# EAGLE board diagrama PCB (EAGLE 9.7.0)
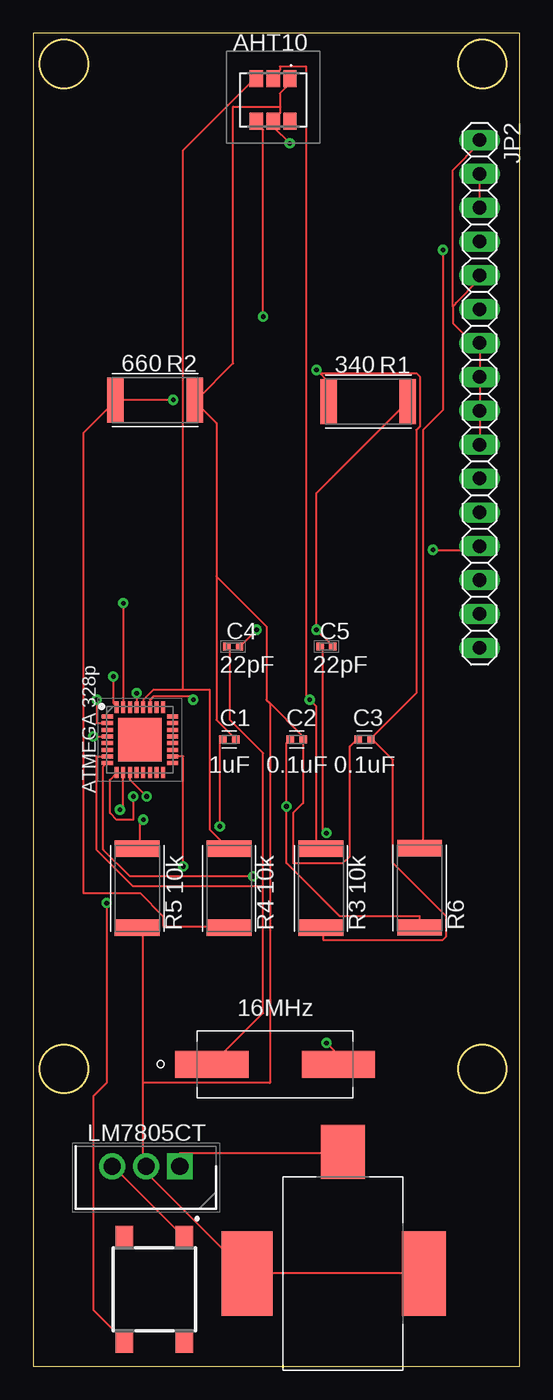
[diagram p0: board, top side]
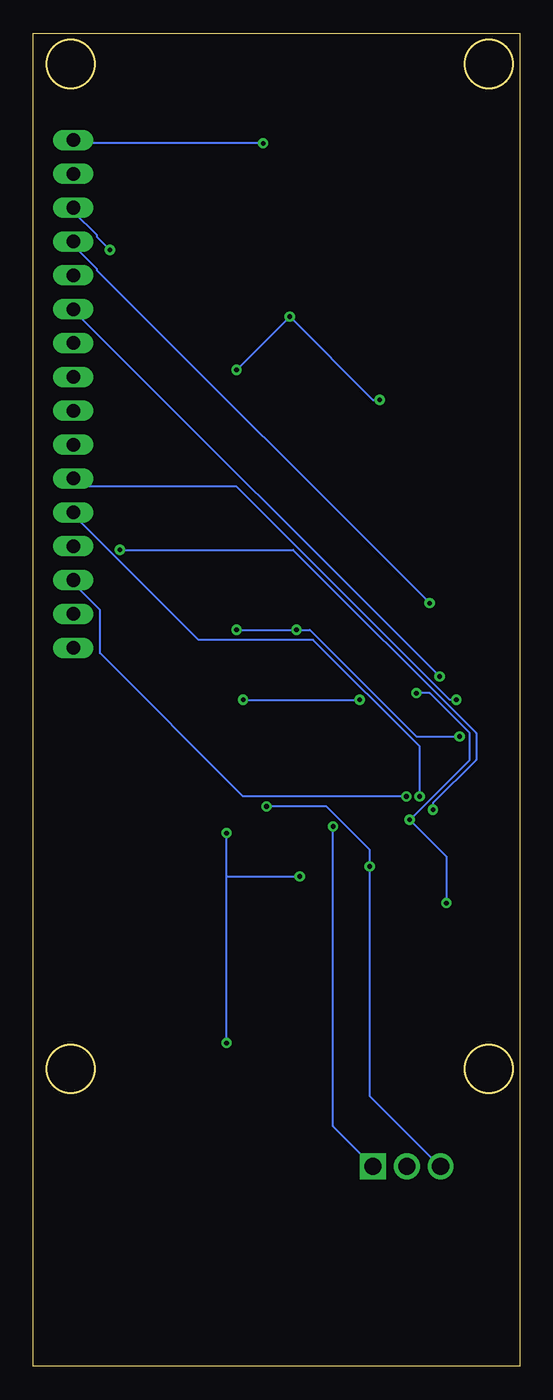
[diagram p1: board, bottom side, seen from below]

Size 36.5 x 100 mm. Coordinates in mm from the lower left corner, seen from the top.
Outline: 0,0 36.5,0 36.5,100 0,100 0,0
Outline: circle at 2.3,22.3 radius 1.8
Outline: circle at 33.7,22.3 radius 1.8
Outline: circle at 33.7,97.7 radius 1.8
Outline: circle at 2.3,97.7 radius 1.8
Copper layers (1*16): Top 0.035mm / dielectric 1.5mm / Bottom 0.035mm
Design rules "default": minimum track width 6mil, minimum drill 0.35mm, track to track 6mil, track to pad 6mil, pad to pad 6mil, via to via 6mil, smd to smd 6mil, copper to edge 40mil, drill to drill 6mil, minimum pad ring 10mil, minimum via ring 8mil, stop-mask expansion 4mil, vias tented up to drill 0mil, thermal gap 10mil

## Footprints (pad centres in the part's own frame; a part is rotated, then mirrored left to right if it is on the bottom)
CAPC1005X60 = smd 0.56 x 0.629: 1 -0.485,0; 2 0.485,0
CAPC1005X55N = smd 0.56 x 0.62: 1 -0.48,0; 2 0.48,0
AHT10 = smd 1.27 x 1: 1 -1.6,1.27; 2 -1.6,0; 3 -1.6,-1.27; 4 1.6,-1.27; 5 1.6,0; 6 1.6,1.27
QFN50P500X500X100-33N = smd 0.85 x 0.3: 1 -2.45,1.75; 2 -2.45,1.25; 3 -2.45,0.75; 4 -2.45,0.25; 5 -2.45,-0.25; 6 -2.45,-0.75; 7 -2.45,-1.25; 8 -2.45,-1.75; 17 2.45,-1.75; 18 2.45,-1.25; 19 2.45,-0.75; 20 2.45,-0.25; 21 2.45,0.25; 22 2.45,0.75; 23 2.45,1.25; 24 2.45,1.75 | smd 0.3 x 0.85: 9 -1.75,-2.45; 10 -1.25,-2.45; 11 -0.75,-2.45; 12 -0.25,-2.45; 13 0.25,-2.45; 14 0.75,-2.45; 15 1.25,-2.45; 16 1.75,-2.45; 25 1.75,2.45; 26 1.25,2.45; 27 0.75,2.45; 28 0.25,2.45; 29 -0.25,2.45; 30 -0.75,2.45; 31 -1.25,2.45; 32 -1.75,2.45 | smd 3.25 x 3.25: 33 0,0
TO254P470X1028X1955-3P = drill 1.29 pad 1.935 square: 1 0,0 | drill 1.29 pad 1.935: 2 2.54,0; 3 5.08,0
RASM722X = smd 3.3 x 4.06: PIN 0,9.14 | smd 3.3 x 6.35: SHUNT 6.1,0 | smd 3.81 x 6.35: SLEEVE -7.19,0
1X16 = drill 1.016 long: 1 -19.05,0; 2 -16.51,0; 3 -13.97,0; 4 -11.43,0; 5 -8.89,0; 6 -6.35,0; 7 -3.81,0; 8 -1.27,0; 9 1.27,0; 10 3.81,0; 11 6.35,0; 12 8.89,0; 13 11.43,0; 14 13.97,0; 15 16.51,0; 16 19.05,0
RESC6332X71 = smd 1.231 x 3.37: 1 -2.97,0; 2 2.97,0
430182070816 = smd 1.55 x 1.3: 1 -3.975,2.25; 2 -3.975,-2.25; 3 3.975,2.25; 4 3.975,-2.25
XTAL1170X500X450N = smd 5.5 x 2: 1 -4.75,0; 2 4.75,0

## Placement (x,y rotation side)
C1  1uF  [CAPC1005X60]  14.7,47.02 0 top
C2  0.1uF  [CAPC1005X60]  19.78,47.02 0 top
C3  0.1uF  [CAPC1005X60]  24.86,47.02 0 top
C4  VJ0402A560FXQCW1BC  [CAPC1005X55N]  15,54 180 top
C5  VJ0402A560FXQCW1BC  [CAPC1005X55N]  22,54 180 top
IC1  AHT10  [AHT10]  18,95 270 top
IC2  ATMEGA328P-MNR  [QFN50P500X500X100-33N]  8,47 0 top
IC3  LM7805CT  [TO254P470X1028X1955-3P]  11,15 180 top
J1  RASM722  [RASM722X]  23.23,6.95 0 top
JP2  PINHD-1X16  [1X16]  33.5,72.95 270 top
R1  340  [RESC6332X71]  25.14,72.37 180 top
R2  660  [RESC6332X71]  9.14,72.48 180 top
R3  10k  [RESC6332X71]  21.59,35.86 90 top
R4  10k  [RESC6332X71]  14.7,35.86 90 top
R5  10k  [RESC6332X71]  7.81,35.86 90 top
R6  10k  [RESC6332X71]  29,35.89 90 top
S1  430182050816  [430182070816]  9.08,5.77 270 top
XTAL1  16MHz  [XTAL1170X500X450N]  18.16,22.65 0 top

## Library data of the parts
C1-C3 = Capacitor; CATEGORY: Capacitor
C4 C5 = Capacitor; DESCRIPTION: Multilayer Ceramic Capacitors MLCC - SMD/SMT 0402 56pF 10volts C0G 1%; HEIGHT: 0.55mm; MANUFACTURER_NAME: Vishay; MANUFACTURER_PART_NUMBER: VJ0402A560FXQCW1BC; MOUSER_PART_NUMBER: 77-VJ0402A560FXQCBC; MOUSER_PRICE-STOCK: https://www.mouser.com/Search/Refine.aspx?Keyword=77-VJ0402A560FXQCBC
IC1 = AHT10; DESCRIPTION: AHT10 Integrated temperature and humidity sensor; HEIGHT: 1.7mm; MANUFACTURER_NAME: Aosong (Guangzhou) Elec; MANUFACTURER_PART_NUMBER: AHT10
IC2 = ATMEGA328P; ARROW_PART_NUMBER: ATMEGA328P-MNR; ARROW_PRICE-STOCK: https://www.arrow.com/en/products/atmega328p-mnr/microchip-technology?region=nac; DESCRIPTION: 8-bit Microcontrollers - MCU AVR 32K FLSH 2K SRAM 1KB EE-20 MHZ 105C; HEIGHT: 1mm; MANUFACTURER_NAME: Microchip; MANUFACTURER_PART_NUMBER: ATMEGA328P-MNR; MOUSER_PART_NUMBER: 556-ATMEGA328P-MNR; MOUSER_PRICE-STOCK: https://www.mouser.co.uk/ProductDetail/Microchip-Technology-Atmel/ATMEGA328P-MNR?qs=6Dg1WZIWLC5fsr6lNbxG3A%3D%3D
IC3 = LM7805CT; ARROW_PART_NUMBER: LM7805CT; ARROW_PRICE-STOCK: https://www.arrow.com/en/products/lm7805ct/texas-instruments; DESCRIPTION: Linear voltage regulator,LM7805CT 5V 1A; HEIGHT: 4.7mm; MANUFACTURER_NAME: Texas Instruments; MANUFACTURER_PART_NUMBER: LM7805CT; MOUSER_PART_NUMBER: 926-LM7805CT; MOUSER_PRICE-STOCK: https://www.mouser.co.uk/ProductDetail/Texas-Instruments/LM7805CT?qs=QbsRYf82W3EaqXeMDVwIfQ%3D%3D
J1 = Connector; CREATED_BY: PCBLayout.com; DIGI-KEY_PART_NO: RASM722X-ND; MANUFACTURER: Switchcraft Inc.; MPN: RASM722X
JP2 = Connector; CATEGORY: CONNECTOR; SUB-CATEGORY: PIN-HEADER
R1-R6 = Resistor; CATEGORY: Resistor; SUB-CATEGORY: Fixed
S1 = button; DESCRIPTION: Black Tactile Tactile Switch, NO 50 mA 1.6mm Surface Mount; HEIGHT: mm; MANUFACTURER_NAME: Wurth Elektronik; MANUFACTURER_PART_NUMBER: 430182050816; MOUSER_PART_NUMBER: 710-430182050816; MOUSER_PRICE-STOCK: https://www.mouser.co.uk/ProductDetail/Wurth-Elektronik/430182050816?qs=wr8lucFkNMUyle0jQPgWGw%3D%3D
XTAL1 = Frequency-Source; CATEGORY: Resistance Weld; DESCRIPTION: SMD Crystal; FREQUENCY: 16MHZ; MANUFRACTURER: Fox Electronics; MPN: FC4SDCBMF16.0-T1; OPERATING_TEMPERATURE: -20*C to 70*c; PART_STATUS: Active; ROHS_COMPLIANT: COMPLIANT; SERIES: C4SD; SUB_CATEGORY: Resistance Weld SMD Crystal; TOLERANCE: ±30ppm; TYPE: Crystal

## Nets
GND: C1.2 C2.2 C3.1 IC1.1 IC1.5 IC3.2 J1.SHUNT J1.SLEEVE JP2.1 JP2.5 JP2.7 JP2.8 JP2.9 JP2.10 R2.1 R5.1
N$1: IC1.3 IC2.28 R4.2
N$2: C4.2 IC2.7 XTAL1.1
N$3: C3.2 IC1.4 R1.2 R2.2 R3.1 R4.1
N$4: C5.2 IC2.8 XTAL1.2
N$5: C1.1 IC3.1 J1.PIN
N$6: JP2.2 JP2.3 R6.2
N$7: IC1.2 IC2.27 R3.2
N$9: C2.1 IC2.18 IC3.3 R6.1 S1.1
N$10: IC2.29 R5.2 S1.4
N$11: C4.1 C5.1 IC2.4 R1.1
N$12: IC2.31 JP2.4
N$13: IC2.32 JP2.6
N$14: IC2.11 JP2.14
N$15: IC2.10 JP2.13
N$16: IC2.9 JP2.12
N$17: IC2.2 JP2.11

## Tracks (layer width: path | path; a pad name or v marks a point on that pad's centre or on a via)
GND  (via drill 0.35)
  Top 0.152: 8.25,21.25 8.25,15 IC3.2 8.5,15 8.5,14.5 16,7 J1.SLEEVE 16.25,7 29.25,7 J1.SHUNT | 8.25,21.25 8.25,32.5 8,32.75 R5.1 | 31.5,79.5 31.5,78.25 32.99,76.76 JP2.7 JP2.8 JP2.9 33.5,69.18 JP2.10 | 31.5,79.5 31.5,89.75 33.46,91.71 JP2.1 | 18.5,94.5 18.5,95.5 19.25,96.25 19.25,96.5 IC1.1 | 18.5,94.5 18.5,94 18,93.5 IC1.5 18,93 v19.25,91.75 | 13.75,59.25 13.75,70.75 12.25,72.25 R2.1 12.25,72.5 15,75.25 15,94.5 18.5,94.5 | 13.75,59.25 13.75,48.5 15,47.25 C1.2 | 17.75,49.75 17.5,50 17.5,55.5 13.75,59.25 | 17.75,49.75 20.25,47.25 C2.2 20.25,47 20.25,42.25 19.5,41.5 19.5,37.75 23.25,37.75 23.75,38.25 23.75,46.5 24.25,47 C3.1 | 8.25,21.25 17.75,21.25 17.75,49.75 | 31.5,79.5 31.71,79.71 31.71,79.76 33.46,81.51 JP2.5
  Bottom 0.152: v19.25,91.75 33.21,91.75 JP2.1
N$1
  Top 0.152: IC2.28 8.25,50 9,50.75 11.25,50.75 | 11.25,50.75 13.25,50.75 13.25,40.25 14.5,39 R4.2 | 11.25,50.75 11.25,91.25 16.5,96.5 IC1.3
N$2
  Top 0.152: 17.25,36 17.25,26.5 13.5,22.75 XTAL1.1 | 17.25,36 17.25,46 14.75,48.5 14.75,54 C4.2 | IC2.7 4.75,45.75 4.75,38.75 7.5,36 17.25,36
N$3  (via drill 0.35)
  Top 0.152: R3.1 21.75,32.75 21.75,32 30.75,32 31,32.25 31,33.75 27,37.75 27,45.5 25.5,47 C3.2 25.5,47.25 28.75,50.5 28.75,70.25 29,70.5 29,74.25 28.75,74.5 21.5,74.5 | v17.25,78.75 17.25,92.75 16.75,93.25 IC1.4 | 21.5,74.5 22,74 22,72.5 R1.2 | v10.5,72.5 6.25,72.5 R2.2 6,72.25 3.75,70 3.75,35.5 8,35.5 9.75,33.75 9.75,33 14.5,33 R4.1 | 21.5,74.5 v21.25,74.75
  Bottom 0.152: v21.25,74.75 v17.25,78.75 11,72.5 v10.5,72.5
N$4  (via drill 0.35)
  Top 0.152: v22,40 21.75,40.25 21.75,54 C5.2 | v22,24.25 22.75,23.5 22.75,22.75 XTAL1.2 | v16.5,36.75 7.25,36.75 5.25,38.75 5.25,45 5.5,45.25 IC2.8
  Bottom 0.152: v22,24.25 22,36.75 | 22,36.75 v22,40 | 22,36.75 v16.5,36.75
N$5  (via drill 0.35)
  Top 0.152: v14,40.5 14,47 C1.1 | IC3.1 11,16 23,16 J1.PIN
  Bottom 0.152: v14,40.5 14,18 IC3.1
N$6  (via drill 0.35)
  Top 0.152: v30.75,83.75 30.75,71.75 29.25,70.25 29.25,39.25 29,39 R6.2 | JP2.3 JP2.2
  Bottom 0.152: v30.75,83.75 31.71,84.71 31.71,84.84 33.46,86.59 JP2.3
N$7  (via drill 0.35)
  Top 0.152: IC2.27 8.75,50 9,50.25 12,50.25 v12,50 | R3.2 21.5,39 21.25,39.25 21.25,49.5 v20.75,50 20.5,50.25 20.5,97.5 18.5,97.5 18.5,97.25 18,96.75 IC1.2
  Bottom 0.152: v20.75,50 v12,50
N$9  (via drill 0.35)
  Top 0.152: R6.1 29,33.75 23,33.75 19,37.75 v19,42 19,46.75 19.25,47 C2.1 | IC2.18 11.25,45.75 v11.25,37.5 | S1.1 11.25,9.75 6,15 IC3.3
  Bottom 0.152: IC3.3 6,15 11.25,20.25 v11.25,37.5 11.25,38.75 14.5,42 v19,42
N$10  (via drill 0.35)
  Top 0.152: v7.75,50.5 IC2.29 | v8.25,41 8,40.75 8,39 R5.2 | v5.5,34.75 5.5,21.25 4.5,20.25 4.5,4.25 6.75,2 S1.4
  Bottom 0.152: v7.75,50.5 6.75,50.5 3.75,47.5 3.75,45.5 v8.25,41 5.5,38.25 v5.5,34.75
N$11  (via drill 0.35)
  Top 0.152: v16.75,55.25 15.5,54 C4.1 | C5.1 22.25,54 22.25,54.25 v21.25,55.25 21.25,65.5 28,72.25 R1.1 | v4.5,47.25 IC2.4
  Bottom 0.152: v21.25,55.25 v16.75,55.25 15.75,55.25 7.75,47.25 v4.5,47.25
N$12  (via drill 0.35)
  Top 0.152: v6.75,57.25 IC2.31
  Bottom 0.152: v6.75,57.25 31.71,82.21 31.71,82.3 33.46,84.05 JP2.4
N$13  (via drill 0.35)
  Top 0.152: v6,51.75 6,49.75 6.25,49.5 IC2.32
  Bottom 0.152: v6,51.75 33.46,79.21 JP2.6
N$14  (via drill 0.35)
  Top 0.152: IC2.11 7.25,44 v8.5,42.75
  Bottom 0.152: v8.5,42.75 20.75,42.75 31.5,53.5 31.5,56.75 33.46,58.71 JP2.14
N$15  (via drill 0.35)
  Top 0.152: IC2.10 6.75,42 v6.5,41.75 | v30,61.25 33.19,61.25 JP2.13
  Bottom 0.152: v6.5,41.75 6.5,42.25 3.25,45.5 3.25,47.5 17,61.25 v30,61.25
N$16  (via drill 0.35)
  Top 0.152: v7.5,42.75 7.5,41 6.25,41 5.75,41.5 5.75,44 6.25,44.5 IC2.9
  Bottom 0.152: v7.5,42.75 7.5,46.5 15.5,54.5 24.11,54.5 33.46,63.85 JP2.12
N$17  (via drill 0.35)
  Top 0.152: IC2.2 4.75,48.25 v4.75,50
  Bottom 0.152: v4.75,50 5.25,50 21.25,66 32.86,66 JP2.11

## Text on the board
tNames: C4 | C5 | 22pF | 22pF | C1 | C2 | C3 | ATMEGA 328p